# Altium PCB USB_RC522_CARD_RW.PcbDoc
Units mil, origin at the board's own origin, x right, y up, seen from the top; angles counter-clockwise.
Board outline 2110 x 1765 mil, 2 copper layers (Top Layer, Bottom Layer); 65 components, 54 nets, 190 pads, 17 vias.
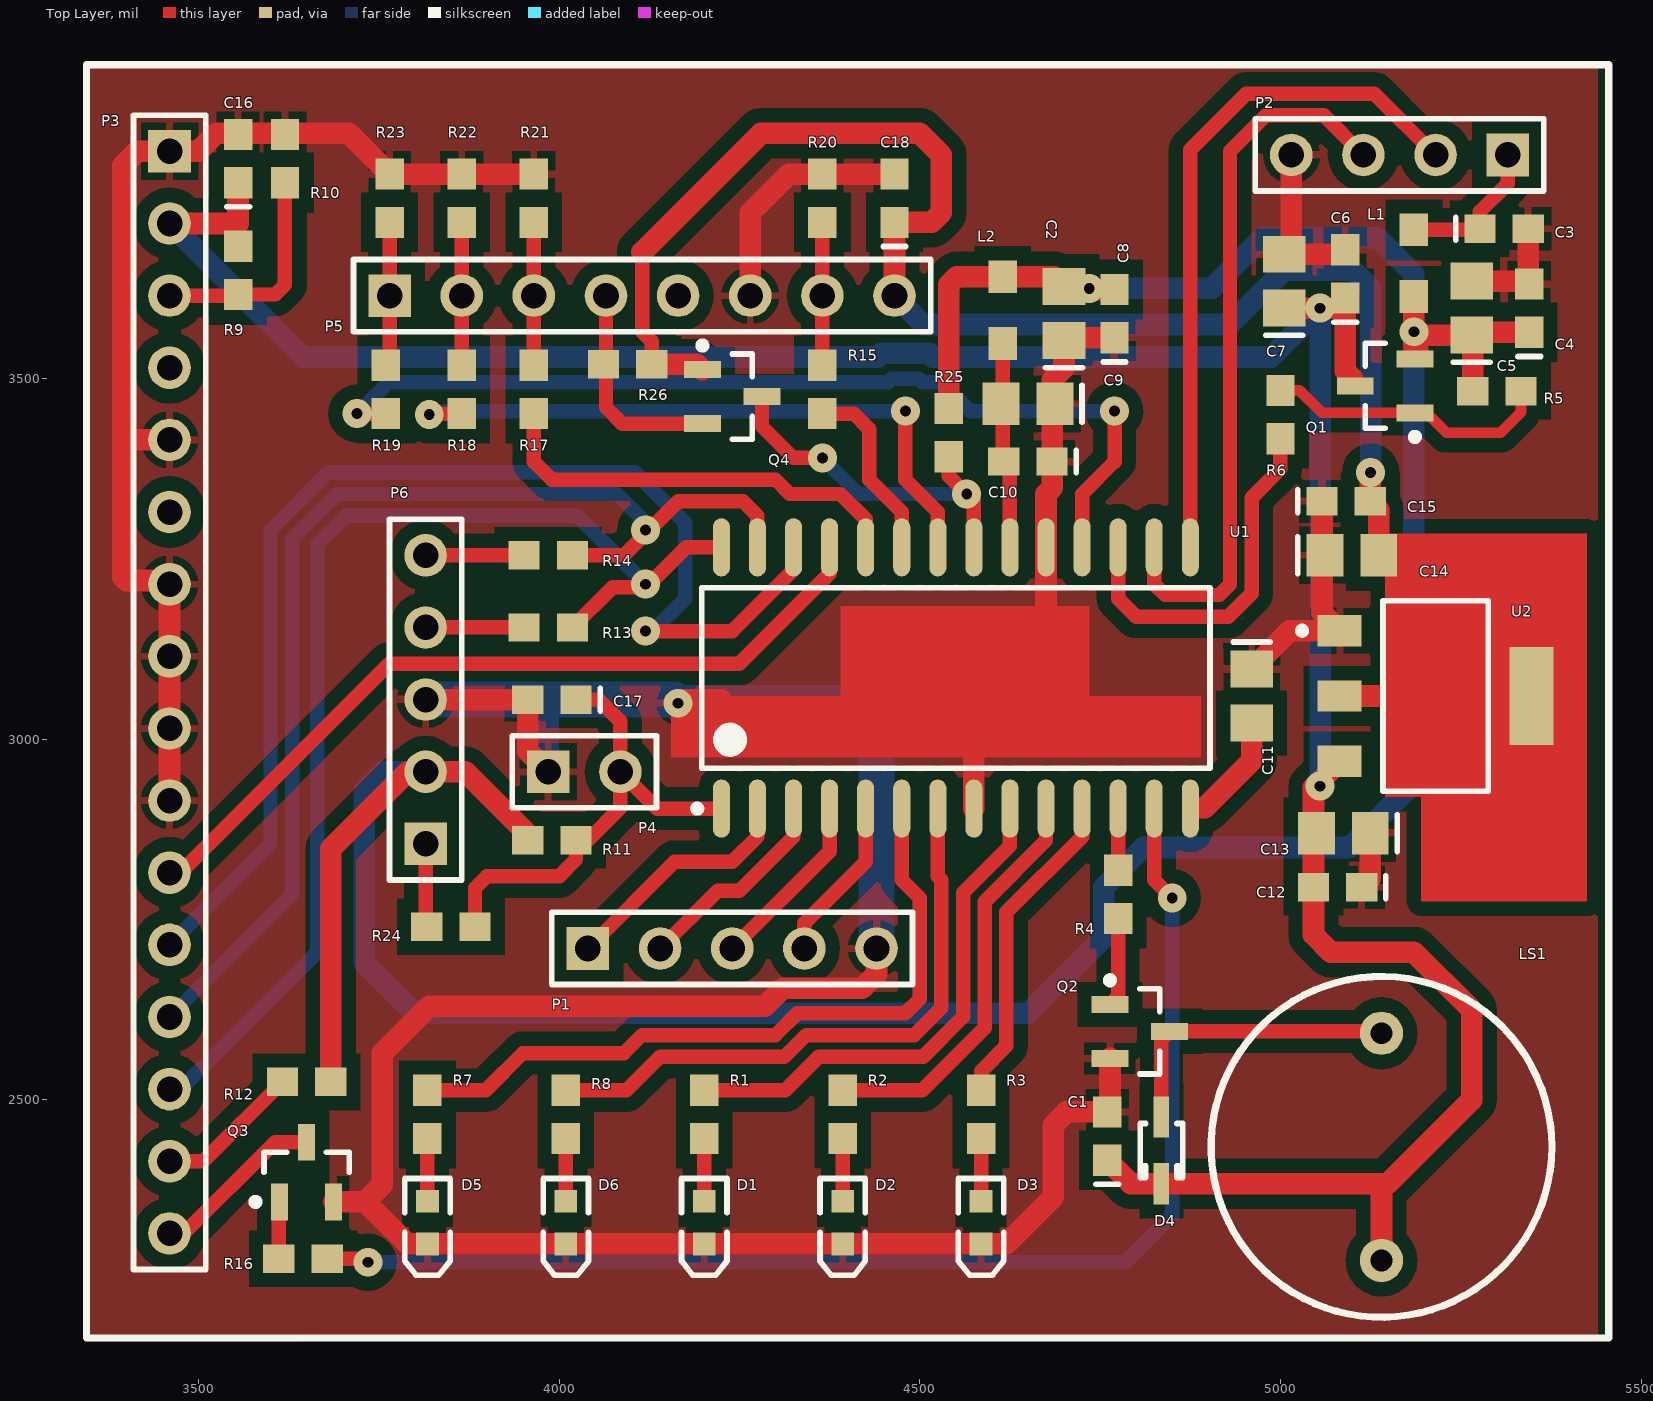
[diagram p0: Top Layer view]
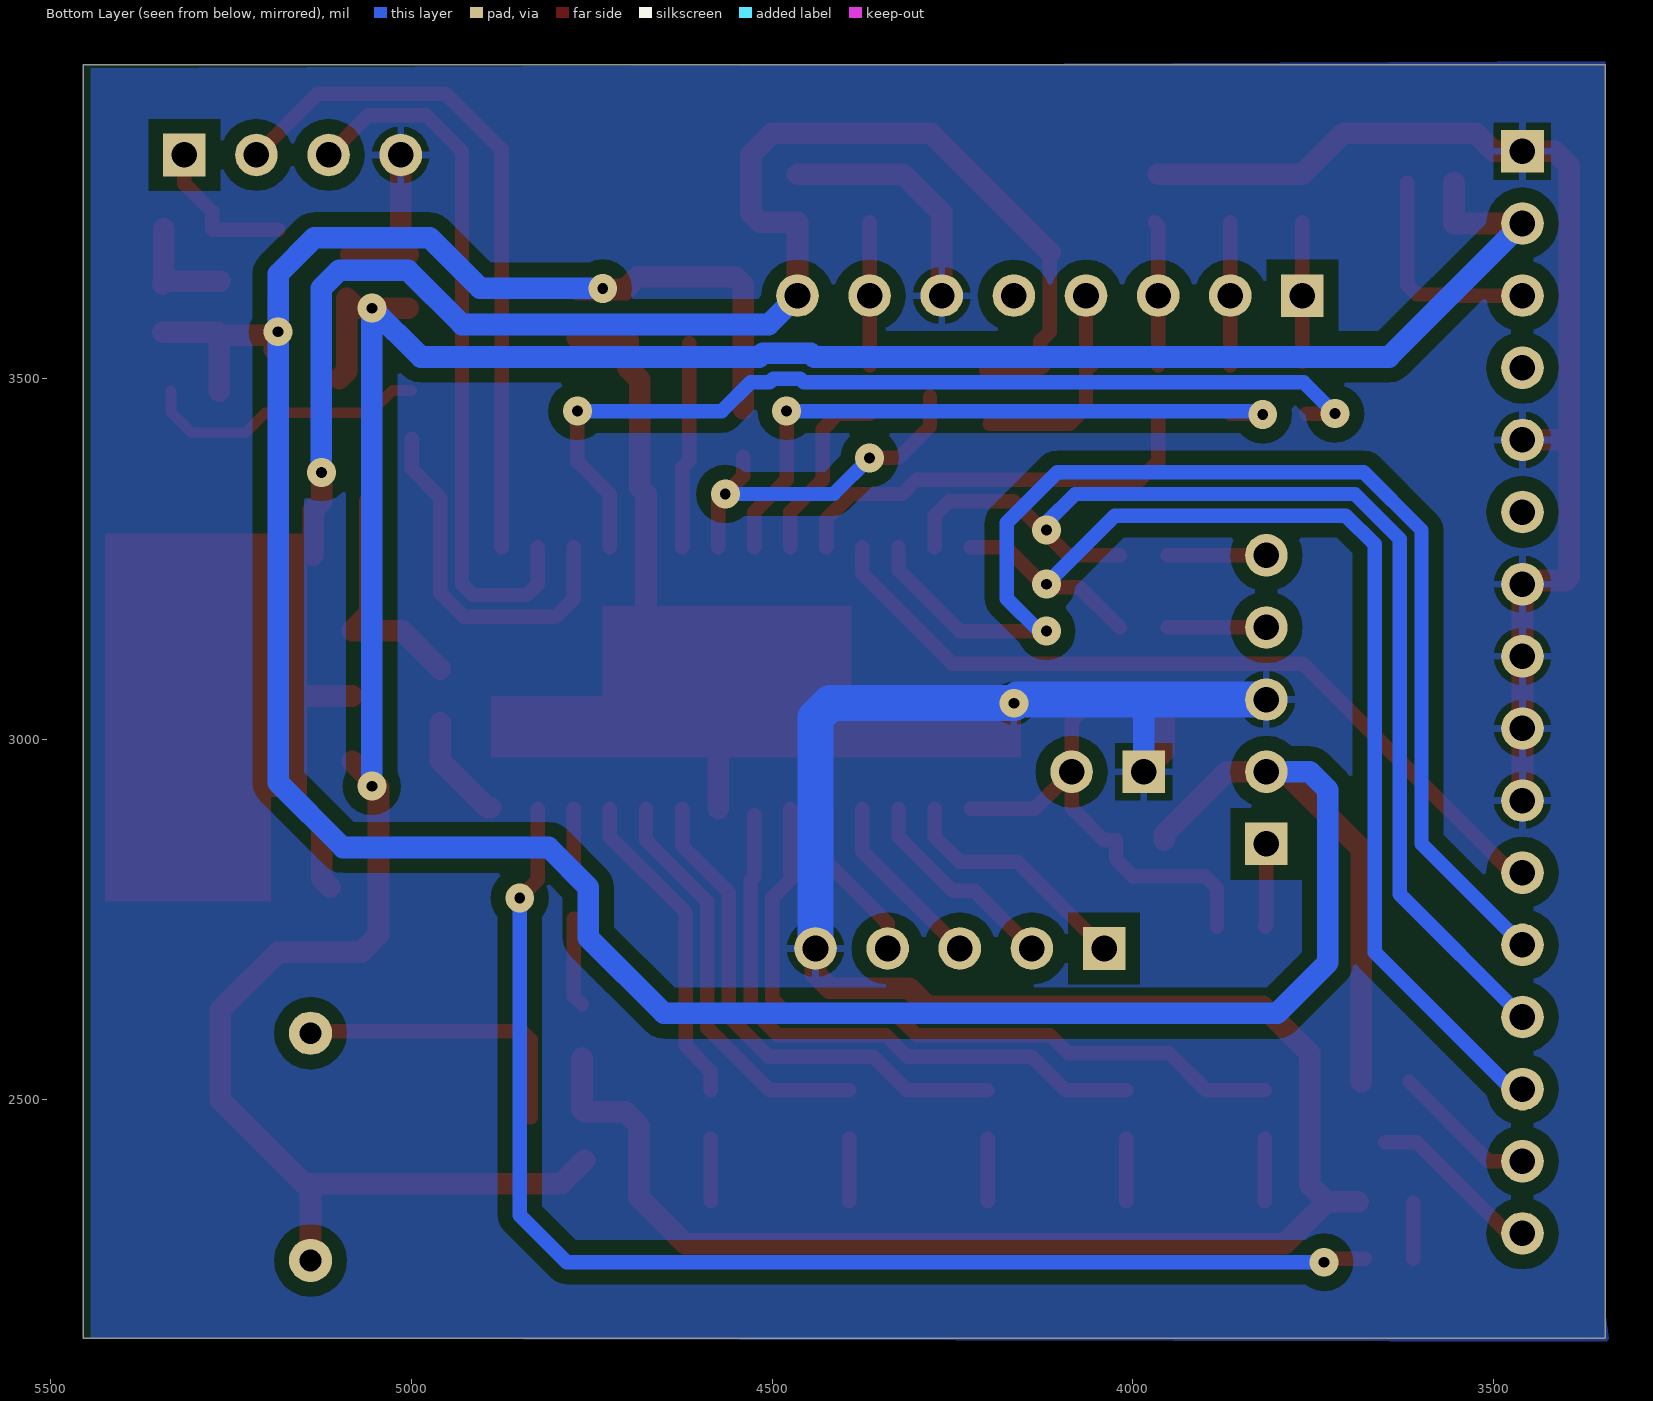
[diagram p1: Bottom Layer view, seen from below]

## Layer stack, top to bottom
Top Solder: solder mask 0.4, Solder Resist, Dk 3.5
Top Layer: signal copper 1.4
Dielectric 1: dielectric 12.6, FR-4, Dk 4.8
Bottom Layer: signal copper 1.4
Bottom Solder: solder mask 0.4, Solder Resist, Dk 3.5

## Board outline
3345,2170 5455,2170 5455,3935 3345,3935

## Design rules (kind name [scope] priority, off if disabled: settings)
Clearance [All] p1: gap=10 except(20: Arc-Poly Track-Poly SMDPad-Poly THPad-Poly Via-Poly Fill-Poly Poly-Poly)
PolygonConnect [All] p1: connectstyle=Relief reliefconductorwidth=10 reliefentries=4 polygonreliefangle="90 Angle" airgapwidth=10
RoutingVias [All] p1: holewidth=20 width=50 viastyle="Through Hole" minholewidth=10 minwidth=50 maxholewidth=40 maxwidth=50
SolderMaskExpansion [All] p1: expansion=4
Width [All] p1: maxlimit=2000 minlimit=10 preferedwidth=30
30 further rules are at their usual default settings.

## Components (designator, comment, footprint, x,y, rotation, side; value= is the part's Value field where it differs from the comment)
C1 "100nF" 0603 4760,2450 r90 top
C2 "10uF" 0805 4700,3590 r90 top
C3 "10nF" 0603 5310,3707.6 r0 top
C4 "10nF" 0603 5345,3597.6 r90 top
C5 "10uF" 0805 5265,3597.6 r90 top
C6 "100nF" 0603 5090,3645 r90 top
C7 "10uF" 0805 5005,3635 r90 top
C8 "100nF" 0603 4770,3590 r90 top
C9 "10uF" 0805 4650,3465 r180 top
C10 "100nF" 0603 4650,3385 r180 top
C11 "470nF" 0805 4960,3060 r270 top
C12 "100nF" 0603 5079.24,2795 r180 top
C13 "10uF" 0805 5087.11,2870 r180 top
C14 "10uF" 0805 5098.86,3255 r0 top
C15 "100nF" 0603 5090.98,3330 r0 top
C16 "100nF" 0603 3555,3805 r90 top
C17 "100nF" 0603 3990,3055 r180 top
C18 "100nF" 0603 4465,3750 r90 top
D1 "LED_WHITE" 1.6X0.8X0.8 4201.25,2330 r270 top
D2 "LED_WHITE" 1.6X0.8X0.8 4393.12,2330 r270 top
D3 "LED_WHITE" 1.6X0.8X0.8 4585,2330 r270 top
D4 "1N4148" SOD323 4835,2430 r270 top
D5 "LED_GREEN" 1.6X0.8X0.8 3817.5,2330 r270 top
D6 "LED_RED" 1.6X0.8X0.8 4009.38,2330 r270 top
L1 "NF" SMD-0805 5185,3660 r270 top
L2 "NF" SMD-0805 4615,3595 r90 top
LS1 "Buzzer 5Vdc" BUZZER 5140,2435 r90 top
P1 "CAPACITIVE SENSORS" HDR1X5 4040,2710 r0 top
P2 "USB B MINI" HDR1X4 5315,3810 r180 top
P3 "2x16 CHAR LCD" HDR1X16 3460,3815 r270 top
P4 "HW_RESET" HDR1X2 3985,2955 r0 top
P5 "RC522 CARD RW" HDR1X8 3765,3615 r0 top
P6 "PICKIT3_ICSP" HDR1X5 3815,2855 r90 top
Q1 "SI2377EDS" SOT23_N 5145,3490 r180 top
Q2 "MMBT2222" SOT23_N 4805,2595 r0 top
Q3 "MMBT2222" SOT23_N 3650,2400 r90 top
Q4 "BSS123" SOT23_N 4240,3475 r0 top
R1 "330R" ERA-0603 4201.25,2480 r270 top
R2 "330R" ERA-0603 4393.12,2480 r270 top
R3 "330R" ERA-0603 4585,2480 r270 top
R4 "1K" ERA-0603 4775,2785 r270 top
R5 "10K" ERA-0603 5300,3482.6 r0 top
R6 "100R" ERA-0603 5000,3450 r270 top
R7 "330R" ERA-0603 3817.5,2480 r270 top
R8 "330R" ERA-0603 4009.38,2480 r270 top
R9 "10K" ERA-0603 3555,3650 r270 top
R10 "10K" ERA-0603 3620,3805 r90 top
R11 "10K" ERA-0603 3990,2860 r180 top
R12 "10R" ERA-0603 3650,2525 r0 top
R13 "1K" ERA-0603 3985,3155 r0 top
R14 "1K" ERA-0603 3985,3255 r0 top
R15 "1K" ERA-0603 4365,3485 r90 top
R16 "1K" ERA-0603 3645,2280 r180 top
R17 "1K" ERA-0603 3965,3485 r90 top
R18 "1K" ERA-0603 3865,3485 r90 top
R19 "1K" ERA-0603 3760,3485 r90 top
R20 "2K2" ERA-0603 4365,3750 r270 top
R21 "2K2" ERA-0603 3965,3750 r270 top
R22 "2K2" ERA-0603 3865,3750 r270 top
R23 "2K2" ERA-0603 3765,3750 r270 top
R24 "100R" ERA-0603 3850,2740 r180 top
R25 "10K" ERA-0603 4540,3425 r90 top
R26 "10K" ERA-0603 4095,3520 r0 top
U1 "PIC18F25K50-I/SO" MCHP-SOIC-SO28_N 4550,3085 r90 top
U2 "REG1117-3.3" ZZ311 5215,3060 r270 top

## Footprints (in the part's own frame and the unit in brackets; to place one, negate y for a bottom-side part, rotate by r counter-clockwise, add the part's x,y. Pads: shape width x height; smd on the part's side, far side on the other; paste and mask are expansions set on the pad)
1.6X0.8X0.8 [mm] "SM LED; 2 Flat Leads"
  rect 0.8x0.8 smd: 1(-0.75,0) 2(0.75,0)
  silkscreen extent -1.55,-0.8 1.85,0.8
0603 [mm] "Chip Capacitor; Body 1.6 x 0.8 mm (LxW typ)"
  rect 1.1x1 smd: 1(-0.85,0) 2(0.85,0)
  silkscreen extent -1.7,-0.4 -1.7,0.4
0805 [mm] "Chip Capacitor; Body 2.0 x 1.2 mm (LxW typ)"
  rect 1.3x1.5 smd: 1(-0.95,0) 2(0.95,0)
  silkscreen extent -1.9,-0.65 -1.9,0.65
BUZZER [mil] "5Vdc PCB buzzer"
  round 60 hole 30: 1(-157.48,0) 2(157.48,0)
  silkscreen extent -236,-236 236,236, body extent -236,-236 236,236, height 378
ERA-0603 [mm] "Chip Resistor; Body 1.6 x 0.8 mm (LxW typ)"
  rect 1.1x1 smd: 1(-0.85,0) 2(0.85,0)
HDR1X2 [mm] "Connector; Header; 2 Position"
  rect 1.5x1.5 hole 0.9: 1(0,0)
  round 1.5 hole 0.9: 2(2.54,0)
  silkscreen extent -1.27,-1.27 3.81,1.27
HDR1X4 [mm] "Connector; Header; 4 Position"
  rect 1.5x1.5 hole 0.9: 1(0,0)
  round 1.5 hole 0.9: 2(2.54,0) 3(5.08,0) 4(7.62,0)
  silkscreen extent -1.27,-1.27 8.89,1.27
HDR1X5 [mm] "Connector; Header; 5 Position"
  rect 1.5x1.5 hole 0.9: 1(0,0)
  round 1.5 hole 0.9: 2(2.54,0) 3(5.08,0) 4(7.62,0) 5(10.16,0)
  silkscreen extent -1.27,-1.27 11.43,1.27
HDR1X8 [mm] "Connector; Header; 8 Position"
  rect 1.5x1.5 hole 0.9: 1(0,0)
  round 1.5 hole 0.9: 2(2.54,0) 3(5.08,0) 4(7.62,0) 5(10.16,0) 6(12.7,0) 7(15.24,0) 8(17.78,0)
  silkscreen extent -1.27,-1.27 19.05,1.27
HDR1X16 [mm] "Connector; Header; 16 Position"
  rect 1.5x1.5 hole 0.9: 1(0,0)
  round 1.5 hole 0.9: 2(2.54,0) 3(5.08,0) 4(7.62,0) 5(10.16,0) 6(12.7,0) 7(15.24,0) 8(17.78,0) 9(20.32,0) 10(22.86,0) 11(25.4,0) 12(27.94,0) 13(30.48,0) 14(33.02,0) 15(35.56,0) 16(38.1,0)
  silkscreen extent -1.27,-1.27 39.37,1.27
MCHP-SOIC-SO28_N [mm] "SOIC, 28-Leads, Body 17.9x7.5mm, Pitch 1.27mm, IPC Medium Density"
  oval 2.05x0.6 smd: 1(-4.6,8.255) 2(-4.6,6.985) 3(-4.6,5.715) 4(-4.6,4.445) 5(-4.6,3.175) 6(-4.6,1.905) 7(-4.6,0.635) 8(-4.6,-0.635) 9(-4.6,-1.905) 10(-4.6,-3.175) 11(-4.6,-4.445) 12(-4.6,-5.715) 13(-4.6,-6.985) 14(-4.6,-8.255) 15(4.6,-8.255) 16(4.6,-6.985) 17(4.6,-5.715) 18(4.6,-4.445) 19(4.6,-3.175) 20(4.6,-1.905) 21(4.6,-0.635) 22(4.6,0.635) 23(4.6,1.905) 24(4.6,3.175) 25(4.6,4.445) 26(4.6,5.715) 27(4.6,6.985) 28(4.6,8.255)
  silkscreen extent -4.72,-8.95 3.18,9.23, body extent -3.75,-8.95 3.75,8.95, height 2.65
SMD-0805 [mm] "Chip Inductor, 2-Leads, Body 2.0x1.2mm"
  rect 1.15x1 smd: 1(-1.175,0) 2(1.175,0)
  body extent -1,-0.6 1,0.6, height 1.1
SOD323 [mm] "SOD-323/SC-76; 2 Leads; Body 1.7 x 1.3 mm, (LxW)"
  rect 1.45x0.55 smd: 1(1.175,0) 2(-1.175,0)
  silkscreen extent -0.95,-0.75 0.95,0.75
SOT23_N [mm] "SOT23, 3-Leads, Body 2.9x1.3mm, Pitch 0.95mm, Lead Span 2.3mm, IPC Medium Density"
  rect 1.3x0.6 smd: 1(-1.05,0.95) 2(-1.05,-0.95) 3(1.05,0)
  silkscreen extent -1.18,-1.5 0.7,1.92, body extent -0.7,-1.5 0.7,1.5, height 1.1
ZZ311 [mm] "SOT-223/SC-73; 4 Leads; Body 6.7 x 7.3 mm, inc. leads (LxW max)"
  rect 1.1x1.55 smd: 1(-2.3,-3.375) 2(0,-3.375) 3(2.3,-3.375)
  rect 3.45x1.55 smd: 4(0,3.375)
  silkscreen extent -3.35,-4.82 3.35,1.85

## Part data
C1 C3 C4 C6 C8 C10 C12 C15 C16 C17 C18: library part C0603, "Ceramic Chip Capacitor - Standard"
C2 C5 C7 C9 C11 C13 C14: library part C0805, "Ceramic Chip Capacitor - Standard"
D1 D2 D3 D5 D6: library part HSMZ-C190, "High Performance Chip LED, Red"
D4: library part 1PS76SB10, "Schottky Barrier Diode"
L1 L2: library part 744790282, "SMD-Multilayer Inductor WE-MI, L = 8.20 µH"
LS1: library part BUZZER, "5Vdc PCB buzzer"
P1 P6: library part "Header 5", "Header, 5-Pin"
P2: library part "Header 4", "Header, 4-Pin"
P3: library part "Header 16", "Header, 16-Pin"
P4: library part "Header 2", "Header, 2-Pin"
P5: library part "Header 8", "Header, 8-Pin"
Q1: library part BSH203, "P-channel Enhancement Mode MOSFET"
Q2 Q3: library part BC817, "NPN General-purpose Transistor"
Q4: "N-channel Enhancement Mode Vertical D-MOSFET"
R1 R2 R3 R4 R5 R6 R7 R8 R9 R10 R11 R12 R13 R14 R15 R16 R17 R18 R19 R20 R21 R22 R23 R24 R25 R26: library part ERAV, "Metal Film Thermosensitive Chip Resistor, 0.56 Ohm to 10k Ohm Range, 5% Tolerance, 0603 Size, 0.063 W"
U1: "Low-Power, High-Performance Microcontroller with XLP Technology, 48 MHz, 24 I/O, -40 to 85 degC, 28-pin SOIC (SO28), Tube"
U2: "800mA and 1A Low Dropout Positive Regulator 2.85V, 3.3V, 5V, and Adjustable"

## Via types
v1: diameter 40, hole 15, Top Layer to Bottom Layer, 17 vias

## Nets (pads, with @x,y where several pads share a name; then routed paths per layer and width w, separated by ;. In a path a pad name is that pad's centre, name@x,y a point inside that pad or via, vN(x,y) a via of type N, cw(c..) or ccw(c..) an arc to the next point about the centre after c; other vN are vias at no path point)
3V3: C14.2 C15.2 C18.1 P5.8 Q4.1 R26.2 U2.2 U2.4 | length 2147.8
  Top Layer w20: 4115,3675 4115,3565 4128.46,3551.54 R26.2
  Top Layer w30: 4115,3675 4280,3840 4500,3840 4530,3810 4530,3730 4516.54,3716.54 C18.1 P5.8 ; R26.2 4191.06,3520 Q4.1 ; U2.2 5155,3060 ; v1(5125,3370) 5124.45,3369.45 C15.2 5136.26,3318.19 C14.2
  Bottom Layer w30: P5.8 4505,3575 4930,3575 5005,3650 5100,3650 5125,3625 v1(5125,3370)
5V: C2.2 C4.1 C5.1 C8.2 L1.2 L2.2 P6.2 Q1.2 R5.1 R11.2 R12.2 R25.2 | length 4604.9
  Top Layer w30: R12.2 3683.46,2848.46 3790,2955 P6.2 3870,2955 3956.54,2868.46 R11.2 ; R25.2 4540,3630 4551.26,3641.26 L2.2 4686.14,3641.26 C2.2 4703.94,3623.46 C8.2 ; L1.2 v1(5185,3565) 5185,3545 5190,3540 ; v1@5189.8,3560.2 C5.1 5268.94,3564.13 C4.1 ; R5.1 C5.1@5266.54,3558.66
  Bottom Layer w30: P6.2 3755,2955 3730,2930 3730,2690 3800,2620 4650,2620 4755,2725 4755,2795 4810,2850 5095,2850 5185,2940 v1(5185,3565) 5185,3645 5135,3695 4975,3695 4905,3625 v1(4735,3625)
5VSW: C1.1 C6.1 C7.1 C12.2 C13.2 C16.1 D4.1 LS1.1 P3.2 Q1.3 R9.1 U2.3 | length 4040
  Top Layer w30: P3.2 3555,3715 C16.1 ; C1.1 4792.8,2383.74 D4.1 5148.74,2383.74 5265,2500 5265,2625 5185,2705 5070,2705 5045.77,2729.23 C12.2 5045.77,2933.09 U2.3 ; C7.1 v1(5055,3597.6) 5076.06,3597.6 C6.1 5090,3510 Q1.3@5100,3500 ; LS1.1 5140,2383.74
  Bottom Layer w30: P3.2 3645,3530 4441.86,3530 4446.86,3535 4513.14,3535 4518.14,3530 4987.4,3530 v1(5055,3597.6) v1(5055,2935)
BUZZER: R4.1 U1.12 | length 85.4
  Top Layer w20: R4.1 U1.12
CAP_SEN0: P1.1 U1.2 | length 338.1
  Top Layer w20: P1.1 4160,2830 4240,2830 4275,2865 U1.2
CAP_SEN1: P1.2 U1.3 | length 288.1
  Top Layer w20: P1.2 4220,2790 4250,2790 4325,2865 U1.3
CAP_SEN2: P1.3 U1.4 | length 249.8
  Top Layer w20: P1.3 4375,2845 U1.4
CAP_SEN3: P1.4 U1.5 | length 229.1
  Top Layer w20: P1.4 4340,2745 4425,2830 U1.5
ICSP_PGC: P6.5 R14.1 | length 136.5
  Top Layer w20: P6.5 R14.1
ICSP_PGD: P6.4 R13.1 | length 136.5
  Top Layer w20: P6.4 R13.1
ICSP_VPP: C17.1 P4.2 R11.1 R24.1 U1.1 | length 671.9
  Top Layer w20: R24.1 3883.46,2793.46 3900,2810 4000,2810 4023.46,2833.46 R11.1 4040,2860 4085,2905 P4.2 ; C17.1 4055,3055 4085,3025 P4.2 ; U1.1 4136.1,2903.9 P4.2
LCD_BLT: R16.1 U1.13 | length 1774.8
  Top Layer w20: R16.1 3730,2280 v1(3735,2275) ; U1.13 4825,2805 v1(4850,2780)
  Bottom Layer w20: v1(3735,2275) 4785,2275 4850,2340 v1(4850,2780)
LCD_D4: P3.11 U1.25 | length 1123
  Top Layer w20: P3.11 3475,2815 3764.53,3104.53 4249.53,3104.53 4375,3230 U1.25
LCD_D5: P3.12 U1.26 | length 1720.1
  Top Layer w20: v1(4120,3150) 4240,3150 4325,3235 U1.26
  Bottom Layer w20: P3.12 3600,2855 3600,3290 3680,3370 4105,3370 4175,3300 4175,3195 4130,3150 v1(4120,3150)
LCD_D6: P3.13 R14.2 U1.27 | length 1615.2
  Top Layer w20: R14.2 4090,3255 4165,3330 4255,3330 4275,3310 U1.27
  Bottom Layer w20: P3.13 3630,2785 3630,3277.57 3692.43,3340 4080,3340 4120,3300 v1(4120,3290)
LCD_D7: P3.14 R13.2 U1.28 | length 1612.3
  Top Layer w20: R13.2 4074.23,3210.77 4120.77,3210.77 4176.1,3266.1 U1.28
  Bottom Layer w20: P3.14 3475,2515 3665,2705 3665,3270.15 3704.85,3310 4025,3310 v1(4120,3215)
LCD_E: P3.6
LCD_RS: P3.4
LED_A: P3.15 R12.1 | length 202.1
  Top Layer w20: P3.15 3506.54,2415 R12.1
LED_GREEN: R7.1 U1.6 | length 1009.2
  Top Layer w20: R7.1 3898.46,2513.46 3950,2565 4090,2565 4115,2590 4300,2590 4330,2620 4480,2620 4500,2640 4500,2780 4475,2805 U1.6
LED_K: P3.16 Q3.3 | length 242.3
  Top Layer w20: P3.16 3480,2315 3606.34,2441.34 Q3.3
LED_RED: R8.1 U1.7 | length 837.4
  Top Layer w20: R8.1 4093.46,2513.46 4140,2560 4312.43,2560 4342.43,2590 4492.43,2590 4530,2627.57 4530,2805 4525,2810 U1.7@4525,2895
LED_STA0: R1.1 U1.9 | length 716.5
  Top Layer w20: R1.1 4313.46,2513.46 4360,2560 4504.85,2560 4560,2615.15 4560,2787.43 4625,2852.43 U1.9
LED_STA1: R2.1 U1.10 | length 571.8
  Top Layer w20: R2.1 4503.46,2513.46 4590,2600 4590,2775 4675,2860 U1.10
LED_STA2: R3.1 U1.11 | length 448.4
  Top Layer w20: R3.1 4585,2540 4620,2575 4620,2760 4725,2865 U1.11
MIFARE_CS: R19.1 U1.18 | length 1336.3
  Top Layer w20: v1(3720,3451.54) R19.1 ; U1.18 4725,3340 4770,3385 v1(4770,3455)
  Bottom Layer w20: v1(3720,3451.54) 3763.46,3495 4456.36,3495 4461.36,3500 4498.64,3500 4503.64,3495 4530,3495 4570,3455 v1(4770,3455)
MIFARE_RST: R15.1 U1.23 | length 256.5
  Top Layer w20: R15.1 4408.46,3451.54 4430,3430 4430,3360 4475,3315 U1.23
MIFARE_SCK: R18.1 U1.22 | length 915.2
  Top Layer w20: v1(3820,3450) 3821.54,3451.54 R18.1 ; v1(4480,3455) 4480,3360 4525,3315 U1.22
  Bottom Layer w20: v1(3820,3450) 3825,3455 v1(4480,3455)
MIFARE_SDI: Q4.3 R25.1 U1.21 | length 503.7
  Top Layer w20: Q4.3 4281.34,3433.66 4325,3390 v1(4365,3390) ; R25.1 4540,3365 v1(4565,3340) 4575,3330 U1.21
  Bottom Layer w20: v1(4365,3390) 4415,3340 v1(4565,3340)
MIFARE_SDO: R17.1 U1.24 | length 598.6
  Top Layer w20: R17.1 3965,3385 3990,3360 4300,3360 4320,3340 4390,3340 4425,3305 U1.24
NetC3_1: C3.1 L1.1 P2.1 | length 210.4
  Top Layer w20: L1.1 5275.2,3706.26 C3.1 5276.54,3731.54 5315,3770 P2.1
NetC9_2: C9.2 C10.2 L2.1 U1.20 | length 286.8
  Top Layer w20: L2.1 4615,3386.54 C10.2 4625,3376.54 U1.20
NetC11_2: C11.2 U1.14 | length 149.5
  Top Layer w30: 4890,2905 4895,2905 4960,2970 C11.2
NetD1_1: D1.1 R1.2 | length 87
  Top Layer w20: D1.1 R1.2
NetD2_1: D2.1 R2.2 | length 87
  Top Layer w20: D2.1 R2.2
NetD3_1: D3.1 R3.2 | length 87
  Top Layer w20: D3.1 R3.2
NetD4_2: D4.2 LS1.2 Q2.3 | length 418.1
  Top Layer w20: D4.2 4835,2583.66 Q2.3 5137.48,2595 LS1.2
NetD5_1: D5.1 R7.2 | length 87
  Top Layer w20: D5.1 R7.2
NetD6_1: D6.1 R8.2 | length 87
  Top Layer w20: D6.1 R8.2
NetP3_3: P3.3 R9.2 R10.1 | length 307.7
  Top Layer w20: P3.3 3553.46,3615 R9.2 3606.54,3616.54 3620,3630 R10.1
NetP6_1: P6.1 R24.2 | length 115.6
  Top Layer w20: P6.1 3815,2741.54 R24.2
NetQ1_1: Q1.1 R5.2 R6.1 | length 398.6
  Top Layer w15: R6.1 5026.54,3483.46 5057.4,3452.6 Q1.1 5202.4,3452.6 5230,3425 5305,3425 5333.46,3453.46 R5.2
NetQ2_1: Q2.1 R4.2 | length 123.8
  Top Layer w20: Q2.1 4775,2643.74 R4.2
NetQ3_1: Q3.1 R16.2 | length 77.6
  Top Layer w20: R16.2 Q3.1@3611.54,2357.6
PWR_CTRL: R6.2 U1.17 | length 510.5
  Top Layer w20: U1.17 4775,3195 4800,3170 4927.43,3170 4960,3202.57 4960,3335 5000,3375 R6.2
RC522_CS: P5.1 R19.2 R23.2 | length 193.1
  Top Layer w20: R19.2@3765,3523.46 P5.1 R23.2
RC522_IRQ: P5.5
RC522_RST: P5.7 R15.2 R20.2 | length 198.1
  Top Layer w20: R15.2 P5.7 R20.2
RC522_SCK: P5.2 R18.2 R22.2 | length 198.1
  Top Layer w20: R18.2 P5.2 R22.2
RC522_SDI: P5.3 R17.2 R21.2 | length 200.1
  Top Layer w20: R17.2 3965,3711.54 R21.2@3970,3716.54
RC522_SDO: P5.4 Q4.2 R26.1 | length 293
  Top Layer w20: R26.1@4056.54,3520 4065,3511.54 4065,3460 4087.4,3437.6 Q4.2 ; R26.1@4065,3528.46 P5.4
USB_D+: P2.3 U1.16 | length 997
  Top Layer w20: U1.16 4825,3215 4840,3200 4915,3200 4930,3215 4930,3815 4980,3865 5060,3865 P2.3
USB_D-: P2.2 U1.15 | length 958.7
  Top Layer w20: U1.15 4875,3817.43 4952.57,3895 5130,3895 P2.2
VSS: C1.2 C2.1 C3.2 C4.2 C5.2 C6.2 C7.2 C8.1 C9.1 C10.1 C11.1 C12.1 C13.1 C14.1 C15.1 C16.2 C17.2 C18.2 D1.2 D2.2 D3.2 D5.2 D6.2 P1.5 P2.4 P3.1 P3.5 P3.7 P3.8 P3.9 P3.10 P4.1 P5.6 P6.3 Q2.2 Q3.2 R10.2 R20.1 R21.1 R22.1 R23.1 U1.8 U1.19 U2.1 | length 7175.6
  Top Layer w30: P3.10 P3.9 P3.8 P3.7 3455,3220 3400,3220 3395,3225 3395,3415 ; P3.5 3395,3415 ; Q3.2 3731.34,2358.66 ; P6.3 C17.2 3956.54,2983.46 P4.1 ; R21.1 R22.1 R23.1 3708.46,3840 3525,3840 3500,3815 P3.1 3415,3815 3395,3795 3395,3415 ; v1(4165,3050) 4170,3055 4225,3055 ; P5.6 4265,3730 4318.46,3783.46 C18.2 ; P1.5 4440,2675 4420,2655 4310,2655 4285,2630 3820,2630 3755,2565 3755,2382.32 3731.34,2358.66 ; U1.8 4575,3070 4675,3170 U1.19 4675,3340 4683.46,3348.46 C10.1 4683.46,3498.46 4700,3515 C2.1 4703.94,3556.54 C8.1 ; Q2.2 4763.66,2487.13 C1.2 4703.46,2483.46 4685,2465 4685,2365 4620.47,2300.47 D3.2 D2.2 D1.2 D6.2 D5.2 3789.53,2300.47 3731.34,2358.66 ; C11.1 5013.15,3150.55 U2.1 5057.52,3175.16 C15.1 ; P2.4 5015,3682.4 C7.2 C6.2@5083.94,3672.4 ; C12.1 5124.51,2806.81 C13.1 ; C5.2 5341.06,3635 C4.2@5343.46,3632.6 ; C3.2 C4.2@5343.46,3632.6 ; C4.2 C4.2@5343.46,3632.6
  Bottom Layer w30: P4.1 3985,3055
  Bottom Layer w50: P6.3 3985,3055 4160,3055 v1(4165,3050) 4420,3050 4440,3030 P1.5

## Polygon pours and split planes (outlines as drawn)
VSS on Top Layer "Top Layer-No Net" (solid, remove dead copper, pour order 8): 3300,3935 5440,3930.03 5440,2169.96 3340,2165 3345,2205 3345,3935
VSS on Top Layer "Top Layer-No Net" (solid, pour order 4): 4410,3185 4410,3060 4200,3060 4200,3070 4260,3070 4375,3185 4410,3185
VSS on Top Layer "Top Layer-No Net" (solid, pour order 2): 4720,3185 4735,3185 4795,3125 4865,3125 4965,3125 4965,3095 4945,3075 4895,3075 4890,3070 4890,3050 4885,3055 4810,3055 4725,3055 4720,3060 4720,3185
VSS on Bottom Layer "Top Layer-No Net" (solid, remove dead copper, pour order 6): 3300,3935 3305,3940 5445,3930.05 5445,2169.98 3340,2165 3345,2205 3345,3935

## Other copper
Top Layer:
  rectangle net 3V3: 5195,2775 5425,2970
  rectangle net VSS: 4155,2975 4890,3060
  rectangle net VSS: 4390,2985 4735,3185
  rectangle net 3V3: 5145,2920 5425,3285

## Silkscreen, mask and mechanical layers (free items; w line width, h text height)
Top Overlay:
  the board outline again, w10